# EAGLE board Through_Hole (EAGLE 6.5.0)
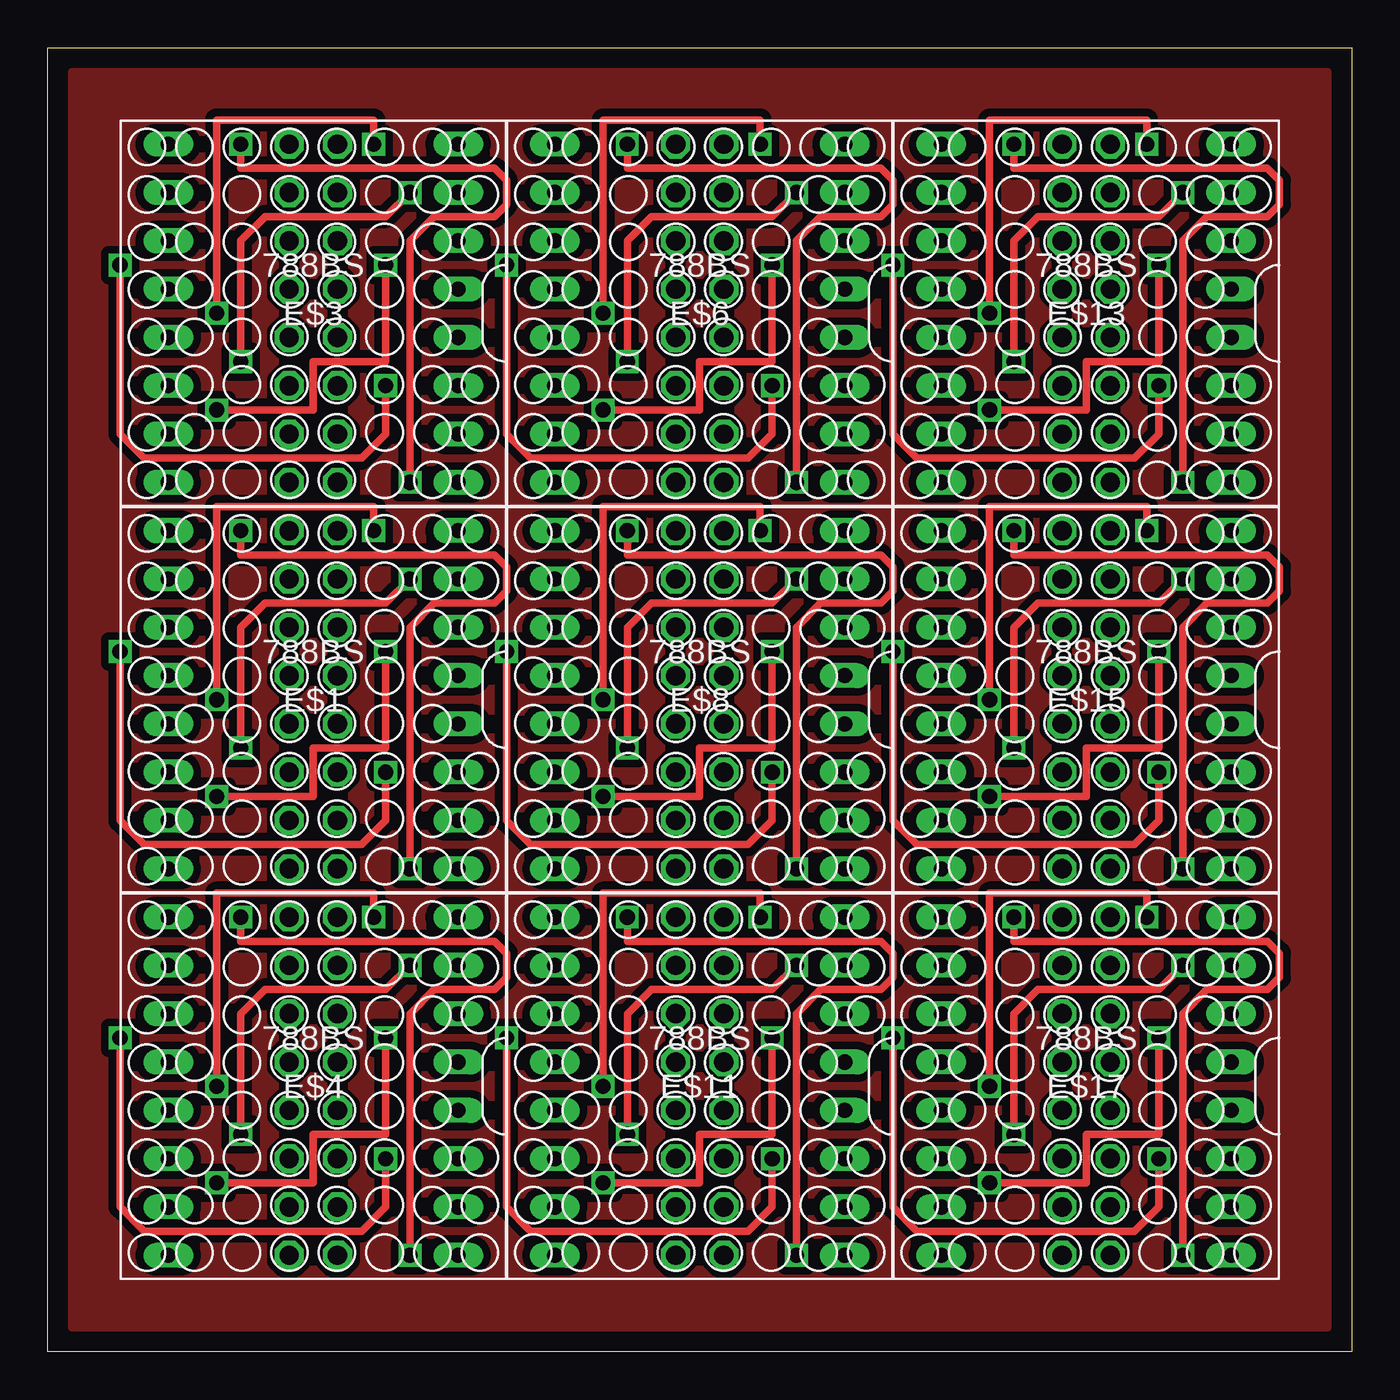
[diagram p0: board, top side]
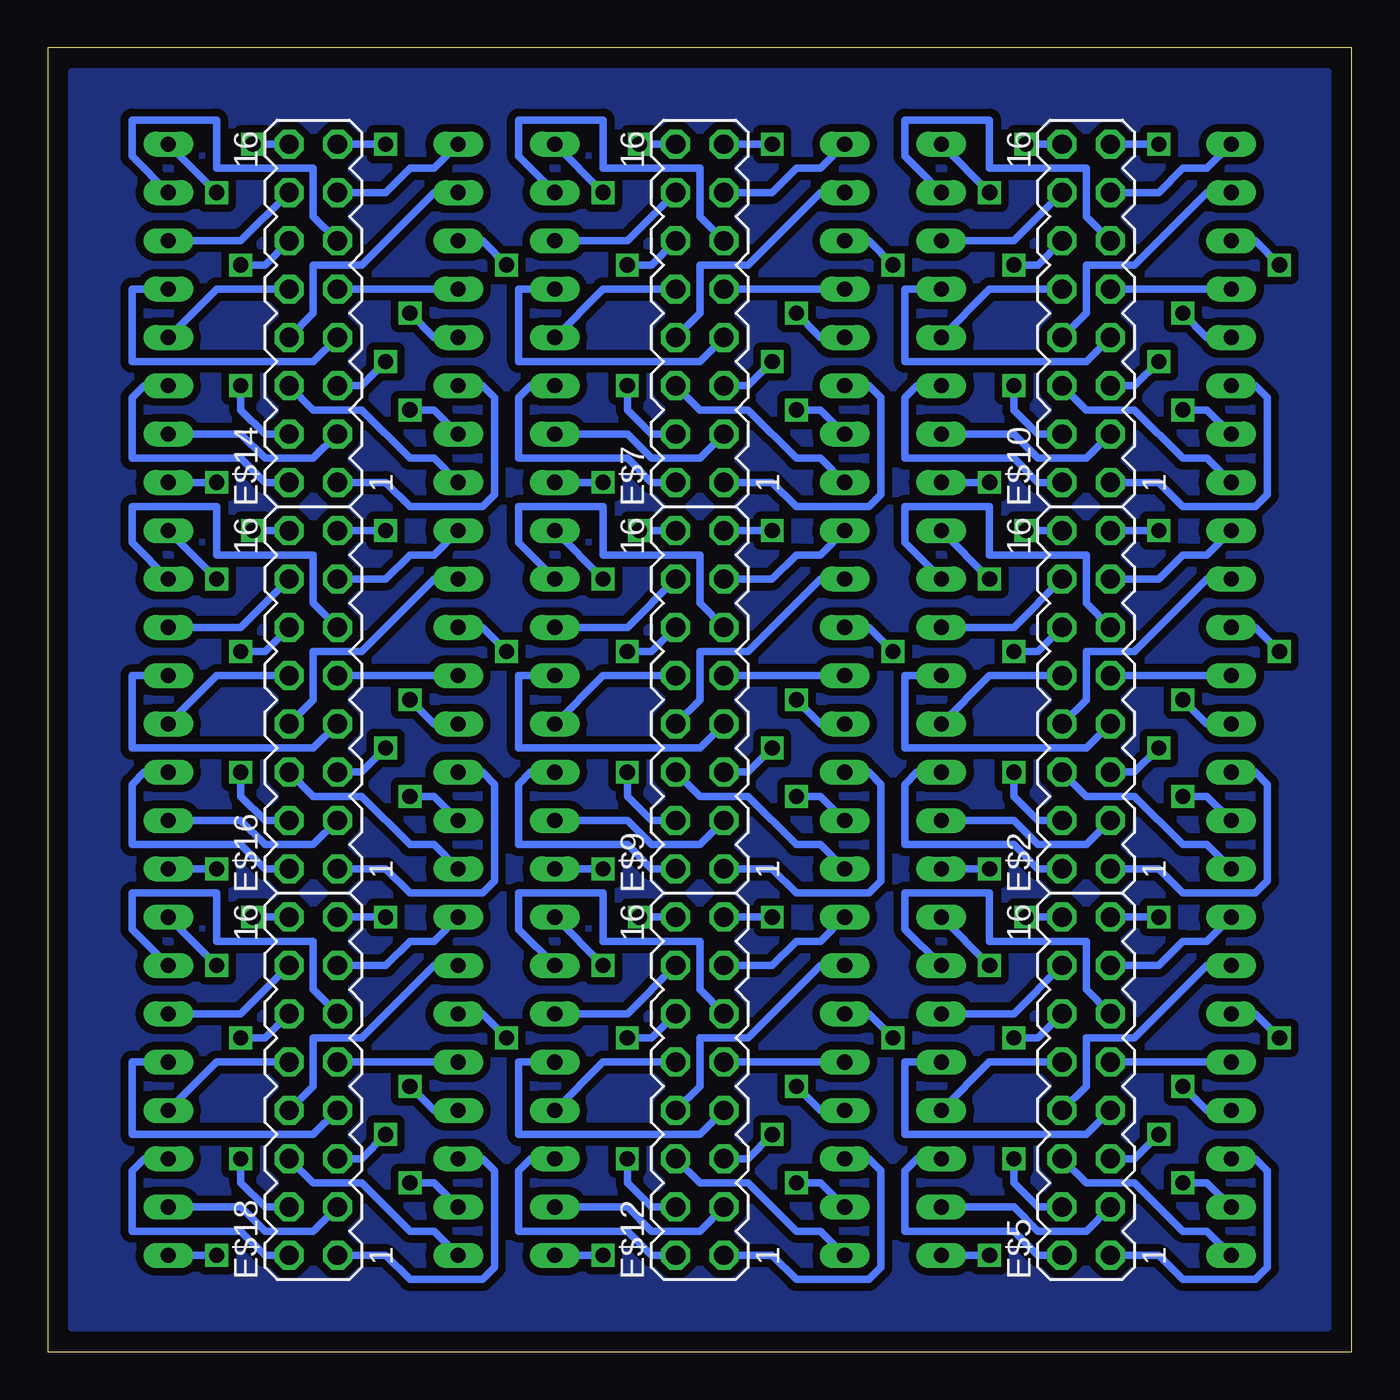
[diagram p1: board, bottom side, seen from below]

Size 68.58 x 68.58 mm. Coordinates in mm from the lower left corner, seen from the top.
Outline: 0,68.58 68.58,68.58 68.58,0 0,0 0,68.58
Copper layers (1*16): Top 0.035mm / dielectric 1.5mm / Bottom 0.035mm
Design rules "default": minimum track width 10mil, minimum drill 24mil, track to track 8mil, track to pad 8mil, pad to pad 8mil, via to via 8mil, smd to smd 8mil, copper to edge 40mil, drill to drill 8mil, minimum pad ring 10mil, minimum via ring 8mil, stop-mask expansion 4mil, vias tented up to drill 0mil, thermal gap 10mil

## Footprints (pad centres in the part's own frame; a part is rotated, then mirrored left to right if it is on the bottom)
788BS_DOT_MATRIX = drill 0.8 long: COL1 -7.62,-1.27; COL2 7.62,-3.81; COL3 7.62,-1.27; COL4 -7.62,6.35; COL5 7.62,3.81; COL6 -7.62,3.81; COL7 -7.62,-6.35; COL8 -7.62,-8.89; ROW1 -7.62,8.89; ROW2 -7.62,-3.81; ROW3 7.62,8.89; ROW4 -7.62,1.27; ROW5 7.62,-8.89; ROW6 7.62,6.35; ROW7 7.62,-6.35; ROW8 7.62,1.27
MA08-2 = drill 1.016 octagon: 1 -8.89,-1.27; 2 -8.89,1.27; 3 -6.35,-1.27; 4 -6.35,1.27; 5 -3.81,-1.27; 6 -3.81,1.27; 7 -1.27,-1.27; 8 -1.27,1.27; 9 1.27,-1.27; 10 1.27,1.27; 11 3.81,-1.27; 12 3.81,1.27; 13 6.35,-1.27; 14 6.35,1.27; 15 8.89,-1.27; 16 8.89,1.27

## Placement (x,y rotation side)
E$1  [788BS_DOT_MATRIX]  13.97,34.29 0 top
E$2  [MA08-2]  13.97,34.29 90 bottom
E$3  [788BS_DOT_MATRIX]  13.97,54.61 0 top
E$4  [788BS_DOT_MATRIX]  13.97,13.97 0 top
E$5  [MA08-2]  13.97,13.97 90 bottom
E$6  [788BS_DOT_MATRIX]  34.29,54.61 0 top
E$7  [MA08-2]  34.29,54.61 90 bottom
E$8  [788BS_DOT_MATRIX]  34.29,34.29 0 top
E$9  [MA08-2]  34.29,34.29 90 bottom
E$10  [MA08-2]  13.97,54.61 90 bottom
E$11  [788BS_DOT_MATRIX]  34.29,13.97 0 top
E$12  [MA08-2]  34.29,13.97 90 bottom
E$13  [788BS_DOT_MATRIX]  54.61,54.61 0 top
E$14  [MA08-2]  54.61,54.61 90 bottom
E$15  [788BS_DOT_MATRIX]  54.61,34.29 0 top
E$16  [MA08-2]  54.61,34.29 90 bottom
E$17  [788BS_DOT_MATRIX]  54.61,13.97 0 top
E$18  [MA08-2]  54.61,13.97 90 bottom

## Library data of the parts
E$1 E$3 E$4 E$6 E$8 E$11 E$13 E$15 E$17 = 788BS_DOT_MATRIX
E$2 E$5 E$7 E$9 E$10 E$12 E$14 E$16 E$18 = con-lstb

## Nets
S$1: E$3.ROW1 E$10.13
S$2: E$3.ROW2 E$10.1
S$3: E$3.ROW3 E$10.5
S$4: E$3.ROW4 E$10.9
S$5: E$3.ROW5 E$10.15
S$6: E$3.ROW6 E$10.11
S$7: E$3.ROW7 E$10.3
S$8: E$3.ROW8 E$10.7
S$9: E$3.COL1 E$10.16
S$10: E$3.COL2 E$10.2
S$11: E$3.COL3 E$10.10
S$12: E$3.COL4 E$10.8
S$13: E$3.COL5 E$10.14
S$14: E$3.COL6 E$10.4
S$15: E$3.COL7 E$10.12
S$16: E$3.COL8 E$10.6
S$17: E$1.ROW2 E$2.1
S$18: E$1.ROW1 E$2.13
S$19: E$1.ROW3 E$2.5
S$20: E$1.ROW4 E$2.9
S$21: E$1.ROW5 E$2.15
S$22: E$1.ROW6 E$2.11
S$23: E$1.ROW7 E$2.3
S$24: E$1.ROW8 E$2.7
S$25: E$1.COL1 E$2.16
S$26: E$1.COL2 E$2.2
S$27: E$1.COL4 E$2.8
S$28: E$1.COL5 E$2.14
S$29: E$1.COL6 E$2.4
S$30: E$1.COL3 E$2.10
S$31: E$1.COL7 E$2.12
S$32: E$1.COL8 E$2.6
S$33: E$4.ROW2 E$5.1
S$34: E$4.ROW1 E$5.13
S$35: E$4.ROW3 E$5.5
S$36: E$4.ROW4 E$5.9
S$37: E$4.ROW5 E$5.15
S$38: E$4.ROW6 E$5.11
S$39: E$4.ROW7 E$5.3
S$40: E$4.ROW8 E$5.7
S$41: E$4.COL1 E$5.16
S$42: E$4.COL2 E$5.2
S$43: E$4.COL4 E$5.8
S$44: E$4.COL5 E$5.14
S$45: E$4.COL6 E$5.4
S$46: E$4.COL3 E$5.10
S$47: E$4.COL7 E$5.12
S$48: E$4.COL8 E$5.6
S$49: E$6.ROW2 E$7.1
S$50: E$6.ROW1 E$7.13
S$51: E$6.ROW3 E$7.5
S$52: E$6.ROW4 E$7.9
S$53: E$6.ROW5 E$7.15
S$54: E$6.ROW6 E$7.11
S$55: E$6.ROW7 E$7.3
S$56: E$6.ROW8 E$7.7
S$57: E$6.COL1 E$7.16
S$58: E$6.COL2 E$7.2
S$59: E$6.COL4 E$7.8
S$60: E$6.COL5 E$7.14
S$61: E$6.COL6 E$7.4
S$62: E$6.COL3 E$7.10
S$63: E$6.COL7 E$7.12
S$64: E$6.COL8 E$7.6
S$65: E$8.ROW2 E$9.1
S$66: E$8.ROW1 E$9.13
S$67: E$8.ROW3 E$9.5
S$68: E$8.ROW4 E$9.9
S$69: E$8.ROW5 E$9.15
S$70: E$8.ROW6 E$9.11
S$71: E$8.ROW7 E$9.3
S$72: E$8.ROW8 E$9.7
S$73: E$8.COL1 E$9.16
S$74: E$8.COL2 E$9.2
S$75: E$8.COL4 E$9.8
S$76: E$8.COL5 E$9.14
S$77: E$8.COL6 E$9.4
S$78: E$8.COL3 E$9.10
S$79: E$8.COL7 E$9.12
S$80: E$8.COL8 E$9.6
S$81: E$11.ROW2 E$12.1
S$82: E$11.ROW1 E$12.13
S$83: E$11.ROW3 E$12.5
S$84: E$11.ROW4 E$12.9
S$85: E$11.ROW5 E$12.15
S$86: E$11.ROW6 E$12.11
S$87: E$11.ROW7 E$12.3
S$88: E$11.ROW8 E$12.7
S$89: E$11.COL1 E$12.16
S$90: E$11.COL2 E$12.2
S$91: E$11.COL4 E$12.8
S$92: E$11.COL5 E$12.14
S$93: E$11.COL6 E$12.4
S$94: E$11.COL3 E$12.10
S$95: E$11.COL7 E$12.12
S$96: E$11.COL8 E$12.6
S$97: E$13.ROW2 E$14.1
S$98: E$13.ROW1 E$14.13
S$99: E$13.ROW3 E$14.5
S$100: E$13.ROW4 E$14.9
S$101: E$13.ROW5 E$14.15
S$102: E$13.ROW6 E$14.11
S$103: E$13.ROW7 E$14.3
S$104: E$13.ROW8 E$14.7
S$105: E$13.COL1 E$14.16
S$106: E$13.COL2 E$14.2
S$107: E$13.COL4 E$14.8
S$108: E$13.COL5 E$14.14
S$109: E$13.COL6 E$14.4
S$110: E$13.COL3 E$14.10
S$111: E$13.COL7 E$14.12
S$112: E$13.COL8 E$14.6
S$113: E$15.ROW2 E$16.1
S$114: E$15.ROW1 E$16.13
S$115: E$15.ROW3 E$16.5
S$116: E$15.ROW4 E$16.9
S$117: E$15.ROW5 E$16.15
S$118: E$15.ROW6 E$16.11
S$119: E$15.ROW7 E$16.3
S$120: E$15.ROW8 E$16.7
S$121: E$15.COL1 E$16.16
S$122: E$15.COL2 E$16.2
S$123: E$15.COL4 E$16.8
S$124: E$15.COL5 E$16.14
S$125: E$15.COL6 E$16.4
S$126: E$15.COL3 E$16.10
S$127: E$15.COL7 E$16.12
S$128: E$15.COL8 E$16.6
S$129: E$17.ROW2 E$18.1
S$130: E$17.ROW1 E$18.13
S$131: E$17.ROW3 E$18.5
S$132: E$17.ROW4 E$18.9
S$133: E$17.ROW5 E$18.15
S$134: E$17.ROW6 E$18.11
S$135: E$17.ROW7 E$18.3
S$136: E$17.ROW8 E$18.7
S$137: E$17.COL1 E$18.16
S$138: E$17.COL2 E$18.2
S$139: E$17.COL4 E$18.8
S$140: E$17.COL5 E$18.14
S$141: E$17.COL6 E$18.4
S$142: E$17.COL3 E$18.10
S$143: E$17.COL7 E$18.12
S$144: E$17.COL8 E$18.6

## Tracks (layer width: path | path; a pad name or v marks a point on that pad's centre or on a via)
S$1
  Bottom 0.406: E$10.13 10.16,60.96 8.89,62.23 7.62,62.23 E$3.ROW1
S$2
  Bottom 0.406: E$10.1 10.16,45.72 8.89,44.45 5.08,44.45 4.45,45.09 4.45,50.16 5.08,50.8 E$3.ROW2
S$3  (via drill 0.8)
  Top 0.406: v10.16,52.07 10.16,58.42 11.43,59.69 17.78,59.69 v19.05,60.96
  Bottom 0.406: E$3.ROW3 v19.05,60.96 | E$10.5 11.43,50.8 v10.16,52.07
S$4
  Bottom 0.406: E$3.ROW4 E$10.9
S$5  (via drill 0.8)
  Top 0.406: v10.16,63.5 10.16,62.23 23.49,62.23 24.13,61.59 24.13,60.32 23.49,59.69 20.32,59.69 19.05,58.42 v19.05,45.72
  Bottom 0.406: v10.16,63.5 E$10.15 | E$3.ROW5 v19.05,45.72
S$6
  Bottom 0.406: E$3.ROW6 23.49,62.87 23.49,64.77 19.05,64.77 19.05,62.23 13.97,62.23 13.97,59.69 E$10.11
S$7
  Bottom 0.406: E$3.ROW7 17.78,48.26 16.51,46.99 13.97,46.99 E$10.3
S$8
  Bottom 0.406: E$10.7 13.97,52.07 23.49,52.07 23.49,55.88 E$3.ROW8
S$9  (via drill 0.8)
  Top 0.406: v17.14,63.5 17.14,64.77 8.89,64.77 v8.89,54.61
  Bottom 0.406: E$10.16 v17.14,63.5 | E$3.COL1 7.62,53.34 v8.89,54.61
S$10
  Bottom 0.406: E$10.2 16.51,45.72 17.78,46.99 23.49,46.99 23.49,50.16 22.86,50.8 E$3.COL2
S$11
  Bottom 0.406: E$3.COL3 19.05,55.88 E$10.10
S$12
  Bottom 0.406: E$10.8 13.97,54.61 13.97,57.15 11.43,57.15 7.62,60.96 E$3.COL4
S$13
  Bottom 0.406: E$10.14 17.78,58.42 E$3.COL5
S$14  (via drill 0.8)
  Top 0.406: v17.78,50.8 17.78,48.26 16.51,46.99 5.08,46.99 3.81,48.26 v3.81,57.15
  Bottom 0.406: E$10.4 16.51,48.26 17.78,49.53 v17.78,50.8 | v3.81,57.15 5.08,58.42 E$3.COL6
S$15  (via drill 0.8)
  Top 0.406: v17.78,57.15 17.78,52.07 13.97,52.07 13.97,49.53 v8.89,49.53
  Bottom 0.406: E$10.12 16.51,57.15 v17.78,57.15 | v8.89,49.53 7.62,49.53 E$3.COL7
S$16
  Bottom 0.406: E$10.6 13.97,49.53 11.43,49.53 8.89,46.99 7.62,46.99 E$3.COL8
S$17
  Bottom 0.406: E$2.1 10.16,25.4 8.89,24.13 5.08,24.13 4.45,24.77 4.45,29.84 5.08,30.48 E$1.ROW2
S$18
  Bottom 0.406: E$2.13 10.16,40.64 8.89,41.91 7.62,41.91 E$1.ROW1
S$19  (via drill 0.8)
  Top 0.406: v10.16,31.75 10.16,38.1 11.43,39.37 17.78,39.37 v19.05,40.64
  Bottom 0.406: E$1.ROW3 v19.05,40.64 | E$2.5 11.43,30.48 v10.16,31.75
S$20
  Bottom 0.406: E$1.ROW4 E$2.9
S$21  (via drill 0.8)
  Top 0.406: v10.16,43.18 10.16,41.91 23.49,41.91 24.13,41.27 24.13,40.01 23.49,39.37 20.32,39.37 19.05,38.1 v19.05,25.4
  Bottom 0.406: v10.16,43.18 E$2.15 | E$1.ROW5 v19.05,25.4
S$22
  Bottom 0.406: E$1.ROW6 23.49,42.55 23.49,44.45 19.05,44.45 19.05,41.91 13.97,41.91 13.97,39.37 E$2.11
S$23
  Bottom 0.406: E$1.ROW7 17.78,27.94 16.51,26.67 13.97,26.67 E$2.3
S$24
  Bottom 0.406: E$2.7 13.97,31.75 23.49,31.75 23.49,35.56 E$1.ROW8
S$25  (via drill 0.8)
  Top 0.406: v17.14,43.18 17.14,44.45 8.89,44.45 v8.89,34.29
  Bottom 0.406: E$2.16 v17.14,43.18 | E$1.COL1 7.62,33.02 v8.89,34.29
S$26
  Bottom 0.406: E$2.2 16.51,25.4 17.78,26.67 23.49,26.67 23.49,29.84 22.86,30.48 E$1.COL2
S$27
  Bottom 0.406: E$2.8 13.97,34.29 13.97,36.83 11.43,36.83 7.62,40.64 E$1.COL4
S$28
  Bottom 0.406: E$2.14 17.78,38.1 E$1.COL5
S$29  (via drill 0.8)
  Top 0.406: v17.78,30.48 17.78,27.94 16.51,26.67 5.08,26.67 3.81,27.94 v3.81,36.83
  Bottom 0.406: E$2.4 16.51,27.94 17.78,29.21 v17.78,30.48 | v3.81,36.83 5.08,38.1 E$1.COL6
S$30
  Bottom 0.406: E$1.COL3 19.05,35.56 E$2.10
S$31  (via drill 0.8)
  Top 0.406: v17.78,36.83 17.78,31.75 13.97,31.75 13.97,29.21 v8.89,29.21
  Bottom 0.406: E$2.12 16.51,36.83 v17.78,36.83 | v8.89,29.21 7.62,29.21 E$1.COL7
S$32
  Bottom 0.406: E$2.6 13.97,29.21 11.43,29.21 8.89,26.67 7.62,26.67 E$1.COL8
S$33
  Bottom 0.406: E$5.1 10.16,5.08 8.89,3.81 5.08,3.81 4.45,4.45 4.45,9.53 5.08,10.16 E$4.ROW2
S$34
  Bottom 0.406: E$5.13 10.16,20.32 8.89,21.59 7.62,21.59 E$4.ROW1
S$35  (via drill 0.8)
  Top 0.406: v10.16,11.43 10.16,17.78 11.43,19.05 17.78,19.05 v19.05,20.32
  Bottom 0.406: E$4.ROW3 v19.05,20.32 | E$5.5 11.43,10.16 v10.16,11.43
S$36
  Bottom 0.406: E$4.ROW4 E$5.9
S$37  (via drill 0.8)
  Top 0.406: v10.16,22.86 10.16,21.59 23.49,21.59 24.13,20.95 24.13,19.68 23.49,19.05 20.32,19.05 19.05,17.78 v19.05,5.08
  Bottom 0.406: v10.16,22.86 E$5.15 | E$4.ROW5 v19.05,5.08
S$38
  Bottom 0.406: E$4.ROW6 23.49,22.22 23.49,24.13 19.05,24.13 19.05,21.59 13.97,21.59 13.97,19.05 E$5.11
S$39
  Bottom 0.406: E$4.ROW7 17.78,7.62 16.51,6.35 13.97,6.35 E$5.3
S$40
  Bottom 0.406: E$5.7 13.97,11.43 23.49,11.43 23.49,15.24 E$4.ROW8
S$41  (via drill 0.8)
  Top 0.406: v17.14,22.86 17.14,24.13 8.89,24.13 v8.89,13.97
  Bottom 0.406: E$5.16 v17.14,22.86 | E$4.COL1 7.62,12.7 v8.89,13.97
S$42
  Bottom 0.406: E$5.2 16.51,5.08 17.78,6.35 23.49,6.35 23.49,9.53 22.86,10.16 E$4.COL2
S$43
  Bottom 0.406: E$5.8 13.97,13.97 13.97,16.51 11.43,16.51 7.62,20.32 E$4.COL4
S$44
  Bottom 0.406: E$5.14 17.78,17.78 E$4.COL5
S$45  (via drill 0.8)
  Top 0.406: v17.78,10.16 17.78,7.62 16.51,6.35 5.08,6.35 3.81,7.62 v3.81,16.51
  Bottom 0.406: E$5.4 16.51,7.62 17.78,8.89 v17.78,10.16 | v3.81,16.51 5.08,17.78 E$4.COL6
S$46
  Bottom 0.406: E$4.COL3 19.05,15.24 E$5.10
S$47  (via drill 0.8)
  Top 0.406: v17.78,16.51 17.78,11.43 13.97,11.43 13.97,8.89 v8.89,8.89
  Bottom 0.406: E$5.12 16.51,16.51 v17.78,16.51 | v8.89,8.89 7.62,8.89 E$4.COL7
S$48
  Bottom 0.406: E$5.6 13.97,8.89 11.43,8.89 8.89,6.35 7.62,6.35 E$4.COL8
S$49
  Bottom 0.406: E$7.1 30.48,45.72 29.21,44.45 25.4,44.45 24.77,45.09 24.77,50.16 25.4,50.8 E$6.ROW2
S$50
  Bottom 0.406: E$7.13 30.48,60.96 29.21,62.23 27.94,62.23 E$6.ROW1
S$51  (via drill 0.8)
  Top 0.406: v30.48,52.07 30.48,58.42 31.75,59.69 38.1,59.69 v39.37,60.96
  Bottom 0.406: E$6.ROW3 v39.37,60.96 | E$7.5 31.75,50.8 v30.48,52.07
S$52
  Bottom 0.406: E$6.ROW4 E$7.9
S$53  (via drill 0.8)
  Top 0.406: v30.48,63.5 30.48,62.23 43.81,62.23 44.45,61.59 44.45,60.32 43.81,59.69 40.64,59.69 39.37,58.42 v39.37,45.72
  Bottom 0.406: v30.48,63.5 E$7.15 | E$6.ROW5 v39.37,45.72
S$54
  Bottom 0.406: E$6.ROW6 43.81,62.87 43.81,64.77 39.37,64.77 39.37,62.23 34.29,62.23 34.29,59.69 E$7.11
S$55
  Bottom 0.406: E$6.ROW7 38.1,48.26 36.83,46.99 34.29,46.99 E$7.3
S$56
  Bottom 0.406: E$7.7 34.29,52.07 43.81,52.07 43.81,55.88 E$6.ROW8
S$57  (via drill 0.8)
  Top 0.406: v37.46,63.5 37.46,64.77 29.21,64.77 v29.21,54.61
  Bottom 0.406: E$7.16 v37.46,63.5 | E$6.COL1 27.94,53.34 v29.21,54.61
S$58
  Bottom 0.406: E$7.2 36.83,45.72 38.1,46.99 43.81,46.99 43.81,50.16 43.18,50.8 E$6.COL2
S$59
  Bottom 0.406: E$7.8 34.29,54.61 34.29,57.15 31.75,57.15 27.94,60.96 E$6.COL4
S$60
  Bottom 0.406: E$7.14 38.1,58.42 E$6.COL5
S$61  (via drill 0.8)
  Top 0.406: v38.1,50.8 38.1,48.26 36.83,46.99 25.4,46.99 24.13,48.26 v24.13,57.15
  Bottom 0.406: E$7.4 36.83,48.26 38.1,49.53 v38.1,50.8 | v24.13,57.15 25.4,58.42 E$6.COL6
S$62
  Bottom 0.406: E$6.COL3 39.37,55.88 E$7.10
S$63  (via drill 0.8)
  Top 0.406: v38.1,57.15 38.1,52.07 34.29,52.07 34.29,49.53 v29.21,49.53
  Bottom 0.406: E$7.12 36.83,57.15 v38.1,57.15 | v29.21,49.53 27.94,49.53 E$6.COL7
S$64
  Bottom 0.406: E$7.6 34.29,49.53 31.75,49.53 29.21,46.99 27.94,46.99 E$6.COL8
S$65
  Bottom 0.406: E$9.1 30.48,25.4 29.21,24.13 25.4,24.13 24.77,24.77 24.77,29.84 25.4,30.48 E$8.ROW2
S$66
  Bottom 0.406: E$9.13 30.48,40.64 29.21,41.91 27.94,41.91 E$8.ROW1
S$67  (via drill 0.8)
  Top 0.406: v30.48,31.75 30.48,38.1 31.75,39.37 38.1,39.37 v39.37,40.64
  Bottom 0.406: E$8.ROW3 v39.37,40.64 | E$9.5 31.75,30.48 v30.48,31.75
S$68
  Bottom 0.406: E$8.ROW4 E$9.9
S$69  (via drill 0.8)
  Top 0.406: v30.48,43.18 30.48,41.91 43.81,41.91 44.45,41.27 44.45,40.01 43.81,39.37 40.64,39.37 39.37,38.1 v39.37,25.4
  Bottom 0.406: v30.48,43.18 E$9.15 | E$8.ROW5 v39.37,25.4
S$70
  Bottom 0.406: E$8.ROW6 43.81,42.55 43.81,44.45 39.37,44.45 39.37,41.91 34.29,41.91 34.29,39.37 E$9.11
S$71
  Bottom 0.406: E$8.ROW7 38.1,27.94 36.83,26.67 34.29,26.67 E$9.3
S$72
  Bottom 0.406: E$9.7 34.29,31.75 43.81,31.75 43.81,35.56 E$8.ROW8
S$73  (via drill 0.8)
  Top 0.406: v37.46,43.18 37.46,44.45 29.21,44.45 v29.21,34.29
  Bottom 0.406: E$9.16 v37.46,43.18 | E$8.COL1 27.94,33.02 v29.21,34.29
S$74
  Bottom 0.406: E$9.2 36.83,25.4 38.1,26.67 43.81,26.67 43.81,29.84 43.18,30.48 E$8.COL2
S$75
  Bottom 0.406: E$9.8 34.29,34.29 34.29,36.83 31.75,36.83 27.94,40.64 E$8.COL4
S$76
  Bottom 0.406: E$9.14 38.1,38.1 E$8.COL5
S$77  (via drill 0.8)
  Top 0.406: v38.1,30.48 38.1,27.94 36.83,26.67 25.4,26.67 24.13,27.94 v24.13,36.83
  Bottom 0.406: E$9.4 36.83,27.94 38.1,29.21 v38.1,30.48 | v24.13,36.83 25.4,38.1 E$8.COL6
S$78
  Bottom 0.406: E$8.COL3 39.37,35.56 E$9.10
S$79  (via drill 0.8)
  Top 0.406: v38.1,36.83 38.1,31.75 34.29,31.75 34.29,29.21 v29.21,29.21
  Bottom 0.406: E$9.12 36.83,36.83 v38.1,36.83 | v29.21,29.21 27.94,29.21 E$8.COL7
S$80
  Bottom 0.406: E$9.6 34.29,29.21 31.75,29.21 29.21,26.67 27.94,26.67 E$8.COL8
S$81
  Bottom 0.406: E$12.1 30.48,5.08 29.21,3.81 25.4,3.81 24.77,4.45 24.77,9.53 25.4,10.16 E$11.ROW2
S$82
  Bottom 0.406: E$12.13 30.48,20.32 29.21,21.59 27.94,21.59 E$11.ROW1
S$83  (via drill 0.8)
  Top 0.406: v30.48,11.43 30.48,17.78 31.75,19.05 38.1,19.05 v39.37,20.32
  Bottom 0.406: E$11.ROW3 v39.37,20.32 | E$12.5 31.75,10.16 v30.48,11.43
S$84
  Bottom 0.406: E$11.ROW4 E$12.9
S$85  (via drill 0.8)
  Top 0.406: v30.48,22.86 30.48,21.59 43.81,21.59 44.45,20.95 44.45,19.68 43.81,19.05 40.64,19.05 39.37,17.78 v39.37,5.08
  Bottom 0.406: v30.48,22.86 E$12.15 | E$11.ROW5 v39.37,5.08
S$86
  Bottom 0.406: E$11.ROW6 43.81,22.22 43.81,24.13 39.37,24.13 39.37,21.59 34.29,21.59 34.29,19.05 E$12.11
S$87
  Bottom 0.406: E$11.ROW7 38.1,7.62 36.83,6.35 34.29,6.35 E$12.3
S$88
  Bottom 0.406: E$12.7 34.29,11.43 43.81,11.43 43.81,15.24 E$11.ROW8
S$89  (via drill 0.8)
  Top 0.406: v37.46,22.86 37.46,24.13 29.21,24.13 v29.21,13.97
  Bottom 0.406: E$12.16 v37.46,22.86 | E$11.COL1 27.94,12.7 v29.21,13.97
S$90
  Bottom 0.406: E$12.2 36.83,5.08 38.1,6.35 43.81,6.35 43.81,9.53 43.18,10.16 E$11.COL2
S$91
  Bottom 0.406: E$12.8 34.29,13.97 34.29,16.51 31.75,16.51 27.94,20.32 E$11.COL4
S$92
  Bottom 0.406: E$12.14 38.1,17.78 E$11.COL5
S$93  (via drill 0.8)
  Top 0.406: v38.1,10.16 38.1,7.62 36.83,6.35 25.4,6.35 24.13,7.62 v24.13,16.51
  Bottom 0.406: E$12.4 36.83,7.62 38.1,8.89 v38.1,10.16 | v24.13,16.51 25.4,17.78 E$11.COL6
S$94
  Bottom 0.406: E$11.COL3 39.37,15.24 E$12.10
S$95  (via drill 0.8)
  Top 0.406: v38.1,16.51 38.1,11.43 34.29,11.43 34.29,8.89 v29.21,8.89
  Bottom 0.406: E$12.12 36.83,16.51 v38.1,16.51 | v29.21,8.89 27.94,8.89 E$11.COL7
S$96
  Bottom 0.406: E$12.6 34.29,8.89 31.75,8.89 29.21,6.35 27.94,6.35 E$11.COL8
S$97
  Bottom 0.406: E$14.1 50.8,45.72 49.53,44.45 45.72,44.45 45.09,45.09 45.09,50.16 45.72,50.8 E$13.ROW2
S$98
  Bottom 0.406: E$14.13 50.8,60.96 49.53,62.23 48.26,62.23 E$13.ROW1
S$99  (via drill 0.8)
  Top 0.406: v50.8,52.07 50.8,58.42 52.07,59.69 58.42,59.69 v59.69,60.96
  Bottom 0.406: E$13.ROW3 v59.69,60.96 | E$14.5 52.07,50.8 v50.8,52.07
S$100
  Bottom 0.406: E$13.ROW4 E$14.9
S$101  (via drill 0.8)
  Top 0.406: v50.8,63.5 50.8,62.23 64.14,62.23 64.77,61.59 64.77,60.32 64.14,59.69 60.96,59.69 59.69,58.42 v59.69,45.72
  Bottom 0.406: v50.8,63.5 E$14.15 | E$13.ROW5 v59.69,45.72
S$102
  Bottom 0.406: E$13.ROW6 64.14,62.87 64.14,64.77 59.69,64.77 59.69,62.23 54.61,62.23 54.61,59.69 E$14.11
S$103
  Bottom 0.406: E$13.ROW7 58.42,48.26 57.15,46.99 54.61,46.99 E$14.3
S$104
  Bottom 0.406: E$14.7 54.61,52.07 64.14,52.07 64.14,55.88 E$13.ROW8
S$105  (via drill 0.8)
  Top 0.406: v57.78,63.5 57.78,64.77 49.53,64.77 v49.53,54.61
  Bottom 0.406: E$14.16 v57.78,63.5 | E$13.COL1 48.26,53.34 v49.53,54.61
S$106
  Bottom 0.406: E$14.2 57.15,45.72 58.42,46.99 64.14,46.99 64.14,50.16 63.5,50.8 E$13.COL2
S$107
  Bottom 0.406: E$14.8 54.61,54.61 54.61,57.15 52.07,57.15 48.26,60.96 E$13.COL4
S$108
  Bottom 0.406: E$14.14 58.42,58.42 E$13.COL5
S$109  (via drill 0.8)
  Top 0.406: v58.42,50.8 58.42,48.26 57.15,46.99 45.72,46.99 44.45,48.26 v44.45,57.15
  Bottom 0.406: E$14.4 57.15,48.26 58.42,49.53 v58.42,50.8 | v44.45,57.15 45.72,58.42 E$13.COL6
S$110
  Bottom 0.406: E$13.COL3 59.69,55.88 E$14.10
S$111  (via drill 0.8)
  Top 0.406: v58.42,57.15 58.42,52.07 54.61,52.07 54.61,49.53 v49.53,49.53
  Bottom 0.406: E$14.12 57.15,57.15 v58.42,57.15 | v49.53,49.53 48.26,49.53 E$13.COL7
S$112
  Bottom 0.406: E$14.6 54.61,49.53 52.07,49.53 49.53,46.99 48.26,46.99 E$13.COL8
S$113
  Bottom 0.406: E$16.1 50.8,25.4 49.53,24.13 45.72,24.13 45.09,24.77 45.09,29.84 45.72,30.48 E$15.ROW2
S$114
  Bottom 0.406: E$16.13 50.8,40.64 49.53,41.91 48.26,41.91 E$15.ROW1
S$115  (via drill 0.8)
  Top 0.406: v50.8,31.75 50.8,38.1 52.07,39.37 58.42,39.37 v59.69,40.64
  Bottom 0.406: E$15.ROW3 v59.69,40.64 | E$16.5 52.07,30.48 v50.8,31.75
S$116
  Bottom 0.406: E$15.ROW4 E$16.9
S$117  (via drill 0.8)
  Top 0.406: v50.8,43.18 50.8,41.91 64.14,41.91 64.77,41.27 64.77,40.01 64.14,39.37 60.96,39.37 59.69,38.1 v59.69,25.4
  Bottom 0.406: v50.8,43.18 E$16.15 | E$15.ROW5 v59.69,25.4
S$118
  Bottom 0.406: E$15.ROW6 64.14,42.55 64.14,44.45 59.69,44.45 59.69,41.91 54.61,41.91 54.61,39.37 E$16.11
S$119
  Bottom 0.406: E$15.ROW7 58.42,27.94 57.15,26.67 54.61,26.67 E$16.3
S$120
  Bottom 0.406: E$16.7 54.61,31.75 64.14,31.75 64.14,35.56 E$15.ROW8
S$121  (via drill 0.8)
  Top 0.406: v57.78,43.18 57.78,44.45 49.53,44.45 v49.53,34.29
  Bottom 0.406: E$16.16 v57.78,43.18 | E$15.COL1 48.26,33.02 v49.53,34.29
S$122
  Bottom 0.406: E$16.2 57.15,25.4 58.42,26.67 64.14,26.67 64.14,29.84 63.5,30.48 E$15.COL2
S$123
  Bottom 0.406: E$16.8 54.61,34.29 54.61,36.83 52.07,36.83 48.26,40.64 E$15.COL4
S$124
  Bottom 0.406: E$16.14 58.42,38.1 E$15.COL5
S$125  (via drill 0.8)
  Top 0.406: v58.42,30.48 58.42,27.94 57.15,26.67 45.72,26.67 44.45,27.94 v44.45,36.83
  Bottom 0.406: E$16.4 57.15,27.94 58.42,29.21 v58.42,30.48 | v44.45,36.83 45.72,38.1 E$15.COL6
S$126
  Bottom 0.406: E$15.COL3 59.69,35.56 E$16.10
S$127  (via drill 0.8)
  Top 0.406: v58.42,36.83 58.42,31.75 54.61,31.75 54.61,29.21 v49.53,29.21
  Bottom 0.406: E$16.12 57.15,36.83 v58.42,36.83 | v49.53,29.21 48.26,29.21 E$15.COL7
S$128
  Bottom 0.406: E$16.6 54.61,29.21 52.07,29.21 49.53,26.67 48.26,26.67 E$15.COL8
S$129
  Bottom 0.406: E$18.1 50.8,5.08 49.53,3.81 45.72,3.81 45.09,4.45 45.09,9.53 45.72,10.16 E$17.ROW2
S$130
  Bottom 0.406: E$18.13 50.8,20.32 49.53,21.59 48.26,21.59 E$17.ROW1
S$131  (via drill 0.8)
  Top 0.406: v50.8,11.43 50.8,17.78 52.07,19.05 58.42,19.05 v59.69,20.32
  Bottom 0.406: E$17.ROW3 v59.69,20.32 | E$18.5 52.07,10.16 v50.8,11.43
S$132
  Bottom 0.406: E$17.ROW4 E$18.9
S$133  (via drill 0.8)
  Top 0.406: v50.8,22.86 50.8,21.59 64.14,21.59 64.77,20.95 64.77,19.68 64.14,19.05 60.96,19.05 59.69,17.78 v59.69,5.08
  Bottom 0.406: v50.8,22.86 E$18.15 | E$17.ROW5 v59.69,5.08
S$134
  Bottom 0.406: E$17.ROW6 64.14,22.22 64.14,24.13 59.69,24.13 59.69,21.59 54.61,21.59 54.61,19.05 E$18.11
S$135
  Bottom 0.406: E$17.ROW7 58.42,7.62 57.15,6.35 54.61,6.35 E$18.3
S$136
  Bottom 0.406: E$18.7 54.61,11.43 64.14,11.43 64.14,15.24 E$17.ROW8
S$137  (via drill 0.8)
  Top 0.406: v57.78,22.86 57.78,24.13 49.53,24.13 v49.53,13.97
  Bottom 0.406: E$18.16 v57.78,22.86 | E$17.COL1 48.26,12.7 v49.53,13.97
S$138
  Bottom 0.406: E$18.2 57.15,5.08 58.42,6.35 64.14,6.35 64.14,9.53 63.5,10.16 E$17.COL2
S$139
  Bottom 0.406: E$18.8 54.61,13.97 54.61,16.51 52.07,16.51 48.26,20.32 E$17.COL4
S$140
  Bottom 0.406: E$18.14 58.42,17.78 E$17.COL5
S$141  (via drill 0.8)
  Top 0.406: v58.42,10.16 58.42,7.62 57.15,6.35 45.72,6.35 44.45,7.62 v44.45,16.51
  Bottom 0.406: E$18.4 57.15,7.62 58.42,8.89 v58.42,10.16 | v44.45,16.51 45.72,17.78 E$17.COL6
S$142
  Bottom 0.406: E$17.COL3 59.69,15.24 E$18.10
S$143  (via drill 0.8)
  Top 0.406: v58.42,16.51 58.42,11.43 54.61,11.43 54.61,8.89 v49.53,8.89
  Bottom 0.406: E$18.12 57.15,16.51 v58.42,16.51 | v49.53,8.89 48.26,8.89 E$17.COL7
S$144
  Bottom 0.406: E$18.6 54.61,8.89 52.07,8.89 49.53,6.35 48.26,6.35 E$17.COL8
S$145
  pour Top (isolate 0.406): 1.27,66.04 1.27,1.27 67.31,1.27 67.31,67.31 1.27,67.31
S$146
  pour Bottom (isolate 0.406): 1.27,67.31 1.27,1.27 67.31,1.27 67.31,2.54 67.31,67.31